# Altium PCB ALTAIR_PD_Sergeant_V26.2b_Reference.PcbDoc (part 2 of 4)
Units mm, origin at the board's own origin, x right, y up, seen from the top; angles counter-clockwise.
Board outline 74 x 56 mm, 4 copper layers (Top Layer, Layer 1, Layer 2, Bottom Layer), stack 1.675 mm thick; 187 components, 116 nets, 602 pads, 425 vias.
Unrouted connection lines stored in the file: 4.
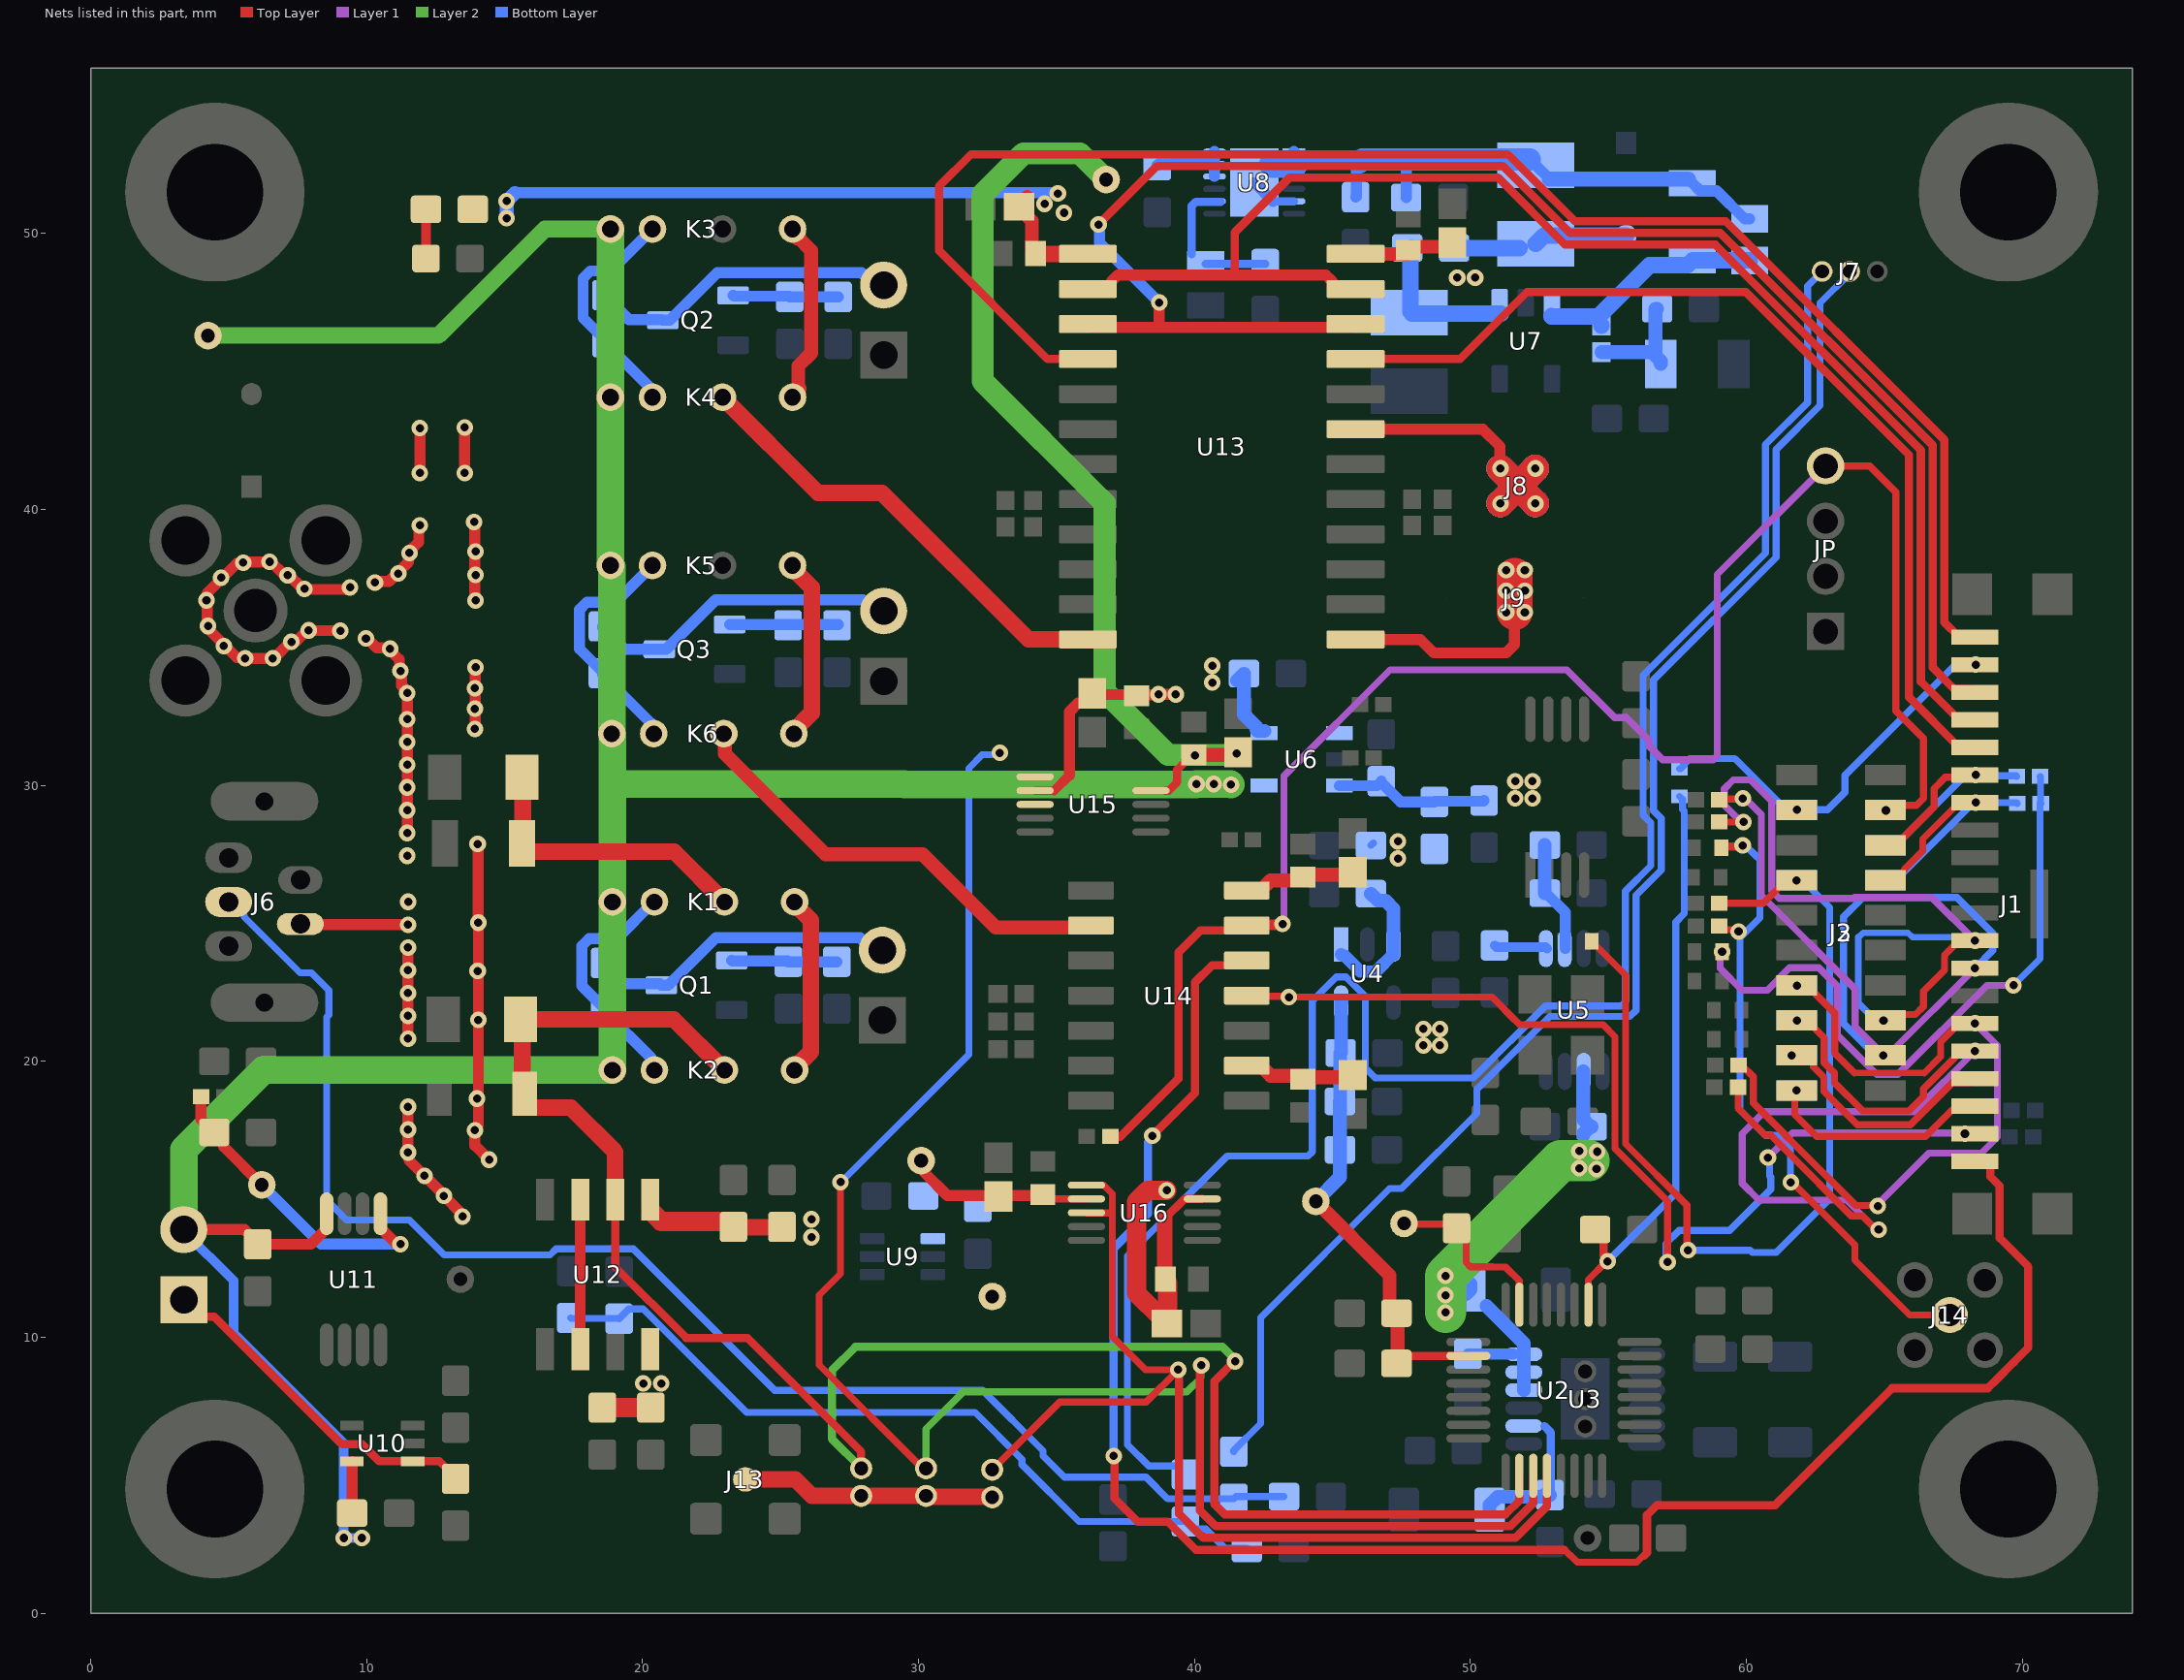
[diagram p4: the nets of this part, all layers, seen from the top]

## Part data
C00 C0 C22 C23 C24 C25 C26 C27 C28 C29 C30 C31 C32 C33 C34 C35 C36 C37 C38 C39 C40 C41 C42 C43 C44 C45 C46 C47 C48 C49 C50 C51 C52 C53: library part CAP, "Cap, Nonpolar, Any, Must choose footprint manually"
C1 C2 C3 C56: library part CAP, "Cap Ceramic 10uF 50V X5R 20% Pad SMD 1206 85C Automotive T/R"
C4 C5 C6 C7 C8 C9 C11 C12 C15 C17: library part CAP, "Murata GRT188R61H105KE13D - Cap MLCC AEC-Q200 X5R 1uF 50V 0603"
C10: library part CAP, "Cap ceramic 10uF 25V X5R 0603"
C13 C54 C55: library part CAP, "Cap Ceramic 0.1uF 50V X7R 10% 0603 125C Paper T/R"
C14 C18 C19 C20: library part CAP, "Cap Ceramic 10uF 25V X5R 0603"
C16: library part CAP, "Cap Ceramic 330pF 50V 5% NP0 1206"
C21: library part CAP, "Cap Ceramic 4.7uF 10V X5R 0805"
D1: library part Schottky, "DIODE SCHOTTKY 20V 500MA SOD123", Average Rectified Current=500mA, Case/Package=SOD-123-2, Forward Voltage=385mV, Max Forward Surge Current (Ifsm)=5.5A, Max Operating Temperature=125°C, Max Repetitive Reverse Voltage (Vrrm)=20V, Max Reverse Leakage Current=250uA, Min Operating Temperature=-65°C, Package Quantity=3000, Contact Plating=Tin, Current Rating=500mA, Element Configuration=Single, Forward Current=500mA, Height=1.12mm, Lead Free="Lead Free", Length=2.69mm, Max Reverse Voltage (DC)=20V, Max Surge Current=5.5A, Number of Pins=2, Output Current=500mA, Packaging="Tape and Reel", Peak Non-Repetitive Surge Current=5.5A, Peak Reverse Current=250uA, Polarity=Standard, Radiation Hardening=No, REACH SVHC="No SVHC", Termination=SMD/SMT, Voltage Rating (DC)=20V, Width=1.6mm
D2: library part LED-blue, "LED BLUE CLEAR 0603 SMD", Case Code (Imperial)=0603, Case Code (Metric)=1608, Color=Blue, Forward Current=30mA, Forward Voltage=3.2V, Manufacturer 1="Wurth Electronics", Manufacturer Part Number 1=150060BS75000, Max Operating Temperature=85°C, Min Operating Temperature=-40°C, Package Quantity=4000, Supplier Part Number 1=732-4966-1-ND, Test Current=20mA, Case/Package=0603, Category=LEDs, ComponentLink1Description=https://datasheet.ciiva.com/29563/150060bs75000-29563034.pdf?src-supplier=Digi-Key, ComponentLink1URL=https://datasheet.ciiva.com/29563/150060bs75000-29563034.pdf?src-supplier=Digi-Key, ComponentLink2Description=https://datasheet.ciiva.com/29279/759426-da-01-en-chipled-0603-w-kl-blau-150060bs75000-29279193.pdf?src-supplier=Conrad, ComponentLink2URL=https://datasheet.ciiva.com/29279/759426-da-01-en-chipled-0603-w-kl-blau-150060bs75000-29279193.pdf?src-supplier=Conrad, ComponentLink3Description=https://datasheet.ciiva.com/29563/150060bs75000-29563035.pdf?src-supplier=Digi-Key, ComponentLink3URL=https://datasheet.ciiva.com/29563/150060bs75000-29563035.pdf?src-supplier=Digi-Key, ComponentLink4Description=https://datasheet.ciiva.com/29563/150060bs75000-29563036.pdf?src-supplier=Digi-Key, ComponentLink4URL=https://datasheet.ciiva.com/29563/150060bs75000-29563036.pdf?src-supplier=Digi-Key, ComponentLink5Description=https://datasheet.ciiva.com/22656/1911343-22656939.pdf?src-supplier=Element14, ComponentLink5URL=https://datasheet.ciiva.com/22656/1911343-22656939.pdf?src-supplier=Element14, ComponentLink6Description=https://datasheet.ciiva.com/48430/150060bs75000-eng-tds-48430039.pdf?src-supplier=Distrelec, ComponentLink6URL=https://datasheet.ciiva.com/48430/150060bs75000-eng-tds-48430039.pdf?src-supplier=Distrelec, Dominant Wavelength=470nm, Height=0.7mm, Length=1.6mm, Lens Style=Clear,Rectangular, Luminous Intensity=145mcd, Mount="Surface Mount", Packaging="Cut Tape", REACH SVHC=Unknown, RoHS=Yes, Stock 1=66561, Supplier 1=Digi-Key, Viewing Angle=140°, Wavelength=470nm, Width=0.8mm
D3: library part Zener, "DIODE ZENER SOD123"
H1 H2 H3 H4: "(Plated) Mounting hole"
J1: "20x1 Header SMD", Manufacturer_Name=Hirose, Manufacturer_Part_Number=DF19-20P-1V(52), Mouser Part Number=798-DF1920P1V52, Datasheet Link=https://www.hirose.com/en/product/document?clcode=CL0685-0037-0-52&productname=DF19-20P-1V(52)&series=DF19&documenttype=2DDrawing&lang=en&documentid=0001394451, Height=5.37mm, Mouser Price/Stock=https://www.mouser.co.uk/ProductDetail/Hirose-Connector/DF19-20P-1V52?qs=QNEnbhJQKvayaXitD7MtBA%3D%3D
J2 J3: "10x2 Stacking Header SMD /  / 20 Position Receptacle Connector 0.050 (1.27mm) Surface Mount, Right Angle Gold", Package=None, Check_prices=https://www.snapeda.com/parts/CLP-110-02-L-D/Samtec/view-part/?ref=eda, MF=Samtec, MP=CLP-110-02-L-D, SnapEDA_Link=https://www.snapeda.com/parts/CLP-110-02-L-D/Samtec/view-part/?ref=snap
  J3: System=Connector
J4: "Coaxial, SMA Female Jack, 50 Ohm, Through-Hole", Manufacturer_Name="Wurth Elektronik", Mouser Part Number=710-60312002114503, Datasheet Link=https://katalog.we-online.de/em/datasheet/60312002114503.pdf, Height=9.56mm, Manufacturer_Part_Number=60312002114503, Mouser Price/Stock=https://www.mouser.co.uk/ProductDetail/Wurth-Elektronik/60312002114503?qs=3jNSNtuqJTL%2FGpZA1FAOxw%3D%3D
J5 J10 J11 J12: library part "Jumper 2POS", "CONN HEADER VERT 2POS", Operating Temperature="-55°C ~ 125°C", Supplier Part Number 1=SAM1068-01-ND, Supplier 1=Digi-Key
J6: "Conn Mini-USB RCP 5 POS Solder ST Thru-Hole 5 Terminal 1 Port", Color=Black, Flammability Rating="UL94 V-0", Manufacturer 1="Amphenol Commercial", Manufacturer Part Number 1=UE25BE5510H, Supplier Part Number 1=UE25BE5510H-ND, Category="USB Connectors", ComponentLink1Description=http://components.arrow.com/part/dataview/0323_00956300?src-supplier=Arrow+Europe, ComponentLink1URL=http://components.arrow.com/part/dataview/0323_00956300?src-supplier=Arrow+Europe, ComponentLink2Description=http://www.alliedelec.com/m/d/e7e3d7a920045eebbdef787e60d8b001.pdf?src-supplier=Allied+Electronics, ComponentLink2URL=http://www.alliedelec.com/m/d/e7e3d7a920045eebbdef787e60d8b001.pdf?src-supplier=Allied+Electronics, ComponentLink3Description=https://www.amphenolcanada.com/ProductSearch/drawings/AC/UE25BEX510X.pdf?src-supplier=Digi-Key, ComponentLink3URL=https://www.amphenolcanada.com/ProductSearch/drawings/AC/UE25BEX510X.pdf?src-supplier=Digi-Key, Contact Material="Copper Alloy", Contact Plating=Gold, Features="High Temperature", Gender=Female, Lead Free="Lead Free", Mount="Through Hole", Number of Contacts=5, Number of Positions=5, RoHS=Yes, Stock 1=6446, Supplier 1=Digi-Key, Termination=PCB
J7: "3x1 Header SMD", Manufacturer_Name="GCT (GLOBAL CONNECTOR TECHNOLOGY)", Datasheet Link=https://www.mouser.com/datasheet/2/837/BC020-1948594.pdf, Height=3.2mm, Manufacturer_Part_Number=BC020-03-A-0200-0300-L-G
J8: library part 855-22-004-30-004101, "2x2 Spring-Loaded SMD 50mil pitch", Manufacturer_Name=Mill-Max, Mouser Part Number=575-8552200430004101, Datasheet Link=https://www.mill-max.com/products/datasheet/sockets/855-22-004-30-004101, Height=4.22mm, Manufacturer_Part_Number=855-22-004-30-004101, Mouser Price/Stock=https://www.mouser.co.uk/ProductDetail/Mill-Max/855-22-004-30-004101?qs=t7xnP681wgXVXSRyupa05g%3D%3D, System=Connector
J9: "Pad for Pogo Pins with Guard", System=Connector
J13: library part MMCX_recp, "Conn MMCX F 50Ohm Solder ST SMD Gold Tray", Case/Package=SMA, Dielectric Material=PTFE, Housing Color=Gold, Manufacturer=Molex, Manufacturer Part Number=0734152061, Manufacturer Part Number 1=73391-0070, Max Frequency=6GHz, Max Operating Temperature=165°C, Min Operating Temperature=-55°C, Package Quantity=1600, Supplier Part Number 1=WM5560-ND, Voltage Rating=170V, Body Material=Brass, Body Plating=Gold, Category="RF / Coaxial Connectors", ComponentLink1Description=https://datasheet.ciiva.com/30257/448910733910070-rf-coax-nectors-30257114.pdf?src-supplier=Onlinecomponents.com, ComponentLink1URL=https://datasheet.ciiva.com/30257/448910733910070-rf-coax-nectors-30257114.pdf?src-supplier=Onlinecomponents.com, ComponentLink2Description=https://datasheet.ciiva.com/5175/0733910070-rf-coax-connectors-173128-5175036.pdf?src-supplier=Mouser, ComponentLink2URL=https://datasheet.ciiva.com/5175/0733910070-rf-coax-connectors-173128-5175036.pdf?src-supplier=Mouser, ComponentLink3Description=https://datasheet.ciiva.com/15172/getdatasheetpartid-226633-15172901.pdf?src-supplier=Verical, ComponentLink3URL=https://datasheet.ciiva.com/15172/getdatasheetpartid-226633-15172901.pdf?src-supplier=Verical, ComponentLink4Description=https://datasheet.ciiva.com/9419/0733910070-rf-coax-connectors-9419351.pdf?src-supplier=Avnet, ComponentLink4URL=https://datasheet.ciiva.com/9419/0733910070-rf-coax-connectors-9419351.pdf?src-supplier=Avnet, ComponentLink5Description=https://datasheet.ciiva.com/16677/0733910070-rf-coax-connectors-16677276.pdf?src-supplier=Avnet+Europe, ComponentLink5URL=https://datasheet.ciiva.com/16677/0733910070-rf-coax-connectors-16677276.pdf?src-supplier=Avnet+Europe, ComponentLink6Description=https://datasheet.ciiva.com/15237/133380734152061-rf-coax-nectors-15237680.pdf?src-supplier=Arrow+Europe, ComponentLink6URL=https://datasheet.ciiva.com/15237/133380734152061-rf-coax-nectors-15237680.pdf?src-supplier=Arrow+Europe, ComponentLink7Description=https://datasheet.ciiva.com/18494/734152061-sd-18494866.pdf?src-supplier=Digi-Key, ComponentLink7URL=https://datasheet.ciiva.com/18494/734152061-sd-18494866.pdf?src-supplier=Digi-Key, ComponentLink8Description=https://datasheet.ciiva.com/3951/128690734152061-rf-coax-nectors-3951867.pdf?src-supplier=Arrow+Electronics, ComponentLink8URL=https://datasheet.ciiva.com/3951/128690734152061-rf-coax-nectors-3951867.pdf?src-supplier=Arrow+Electronics, Connector Type=PCB,SMA,Coaxial, Contact Material=Copper, Contact Plating=Gold, Depth=6.08mm, Fastening Type=Snap, Gender=Female, Halogen Free="Low Halogen", Impedance=50R, Insulation Material=Teflon, Lead Free="Lead Free", Length=6.08mm, Manufacturer 1=Molex, Mount="Through Hole", Orientation=Straight, Packaging=Bulk, Plating=Gold, Pricing 1="1=2.42000, 10=2.19800, 25=2.06320, 50=1.97360, 100=1.88390, 250=1.70448, 500=1.56992, 1000=1.34565, 2500=1.25594 (USD)", Radiation Hardening=No, REACH SVHC=Unknown, RoHS=Yes, Stock 1=31911, Supplier 1=Digi-Key, Termination=Solder
J14: library part CMP-207975-000001-3, "Rf Coaxial, Mmcx Jack, 50 Ohm, Pcb Rohs Compliant: Yes", Dielectric Material=PTFE, Insulation Resistance=1GΩ, Max Operating Temperature=155°C, Min Operating Temperature=-55°C, Voltage Rating=170V, Connector Type=MMCX, Contact Material="Gold, Nickel", Height=4.6mm, Impedance=50Ω, Insertion Loss (dB)=0.25dB, Insulation Material=PTFE, Number of Contacts=1, RoHS=Compliant
J_ACF J_IVC J_TIA: library part BC020-02-A-0200-0300-L-G, "2x1 Header SMD", Manufacturer_Name="GCT (GLOBAL CONNECTOR TECHNOLOGY)", Mouser Part Number=640-BC02002A02300LG, Datasheet Link=https://gct.co/connector/bc020, Manufacturer_Part_Number=BC020-02-A-0200-0300-L-G, Mouser Price/Stock=https://www.mouser.co.uk/ProductDetail/GCT/BC020-02-A-0200-0300-L-G?qs=KUoIvG%2F9IlakgsojlT9P9w%3D%3D
JP: "4x1 Header SMD Partial Shroud", Manufacturer_Name="TE Connectivity", Mouser Part Number=571-440054-4, Arrow Part Number=440054-4, Arrow Price/Stock=https://www.arrow.com/en/products/440054-4/te-connectivity?utm_currency=USD&region=europe, Datasheet Link=https://www.te.com/commerce/DocumentDelivery/DDEController?Action=srchrtrv&DocNm=1-1773713-2_HPI_QRG_EN&DocType=Data%20Sheet&DocLang=English&PartCntxt=440054-4&DocFormat=pdf, Height=6.35mm, Manufacturer_Part_Number=440054-4, Mouser Price/Stock=https://www.mouser.co.uk/ProductDetail/TE-Connectivity/440054-4?qs=JFPmFzpscO7310iGSDds%2FA%3D%3D
K1 K2 K3 K4 K5 K6: library part "RELAY 118-A-5/2D", "High coil resistance SIL/SIP Reed Relay 118-A-5/2D"
L1 L2: library part IND, "Inductor 10uH 20% 0.9A 0.1729Ohm 1210", Case Code (Imperial)=1210, Case Code (Metric)=3225, Current Rating=900mA, DC Resistance (DCR)=172.9mR, Inductance Tolerance=20%, Max Operating Temperature=105°C, Min Operating Temperature=-40°C, Package Quantity=1000, Resistor Type=Wirewound, Self Resonant Frequency=23MHz, Test Frequency=100kHz, Case/Package=1210, Core Material=Ferrite, DC Current=900mA, Depth=2.7mm, Halogen Free="Halogen Free", Height=2.5mm, Height - Seated (Max)=0.106inch, Inductance=10uH, Lead Free="Lead Free", Length=3.4mm, Max DC Current=900mA, Military Standard=Not, Mount="Surface Mount", Number of Pins=2, Packaging="Tape and Reel", Radiation Hardening=No, Saturation Current=900mA, Series=CB, Shielding=Unshielded, Termination=SMD/SMT, Tolerance=20%, Width=0.098inch
Q1 Q2 Q3: library part "NMOS DMG2302UK", "DIODES INC. Power MOSFET, N Channel, 20 V, 2.8 A, 0.061 ohm, SOT-23, Surface Mount", Case/Package=TO-236-3, Continuous Drain Current (ID)=2.8A, Drain to Source Voltage (Vdss)=20V, Input Capacitance=130pF, Manufacturer=Vishay, Manufacturer 1=Diodes, Manufacturer Part Number=Si7414DN, Manufacturer Part Number 1=DMG2302UK-7, Max Operating Temperature=150°C, Max Power Dissipation=660mW, Min Operating Temperature=-55°C, Supplier Part Number=SI7414DN-T1-E3CT-ND, Supplier Part Number 1=DMG2302UK-7DICT-ND, Category=MOSFETs, ComponentLink1Description=http://www.farnell.com/datasheets/2814387.pdf?src-supplier=Farnell, ComponentLink1URL=http://www.farnell.com/datasheets/2814387.pdf?src-supplier=Farnell, ComponentLink2Description=http://www.farnell.com/datasheets/2814387.pdf?src-supplier=Element14, ComponentLink2URL=http://www.farnell.com/datasheets/2814387.pdf?src-supplier=Element14, ComponentLink3Description=https://www.diodes.com/assets/Datasheets/DMG2302UK.pdf?src-supplier=Digi-Key, ComponentLink3URL=https://www.diodes.com/assets/Datasheets/DMG2302UK.pdf?src-supplier=Digi-Key, ComponentLink4Description=http://www.farnell.com/datasheets/2814387.pdf?src-supplier=Newark, ComponentLink4URL=http://www.farnell.com/datasheets/2814387.pdf?src-supplier=Newark, Last Edited By="Russell Burge", Last Edited On=3/9/2016, Mount="Surface Mount", Packaging="Tape and Reel", Rds On Max=90mR, RoHS=Yes, Stock 1=551704, Supplier=Digikey, Supplier 1=Digi-Key
R0 R27 R28 R29 R30 R31 R32 R33 R34 R35 R36 R37 R38 R39 R40 R41 R42 R43 R44 R45 R46 R47 R48 R49 R50 R51 R52 R53 R54 R55 R56 R57 R99: library part RES, "Res, Any, Manually select footprint"
R1 R17 R58 R59: library part RES, "Vishay CRCW060310K0FKEA SMD 0603 10k, CRCW e3 Series, 75V, thick film, 100mW"
R2 R5 R6 R7 R9 R10 R11 R12 R13: library part RES, "Res 47Ohm 5% 0.063W 0402 Thick Film AEC-Q200 compliant"
R3 R4 R8 R63 R64: library part RES, "Yageo RC0402R-070RL"
R14 R19 R20: library part RES, "Res 0603 ??k ohms 0.1W"
R15: library part RES, "Res SMD 0603 0.1% 0.10W T.C. 10ppm 75K"
R16: library part RES, "Res SMD 150kOhm 1% 1/8W 0603"
R18: library part RES, "Res SMD 330 Ohm 1% 1/10W 0603"
R21: library part RES, "Yageo RC0603FR-07100KL - Res 100kOhm 1% 1/10W 0603"
R22: library part RES, "Yageo RC0603FR-07200KL - Res 200kOhm 1% 1/10W 0603"
R23: library part RES, "Panasonic ERA-6AEB303V - Res 30kOhm 0.1% 1/8W 0805"
R24: library part RES, "Res 1kOhm 1% 1/16W 0402"
R25: library part RES, "Vishay TNPU12061K50BZEN00 - Res 1.5kOhm 0.1% 1/4W 1206"
R26: library part RES, "Res SMD 150kOhm  1% 1/8W 0603"
R60 R61 R62: library part RES, "Anti-Sulfurated Res Automotive Grade 33Ohm 1% 100ppm/C 0402"
RT1: library part "THERM_RES NTC 0603 10K 1%", "THERMISTOR NTC 10KOHM 3380K 0603", Case Code (Imperial)=0603, Case Code (Metric)=1608, Manufacturer 1=Murata, Manufacturer Part Number 1=NCU18XH103F60RB, Max Operating Temperature=125°C, Min Operating Temperature=-40°C, Supplier Part Number 1=490-16279-1-ND, Case/Package=0603, Category=Thermistors, ComponentLink1Description=http://www.farnell.com/datasheets/2095755.pdf?src-supplier=Farnell, ComponentLink1URL=http://www.farnell.com/datasheets/2095755.pdf?src-supplier=Farnell, ComponentLink2Description=https://www.murata.com/en-us/products/productdata/8796836233246/L0770E.pdf?src-supplier=Digi-Key, ComponentLink2URL=https://www.murata.com/en-us/products/productdata/8796836233246/L0770E.pdf?src-supplier=Digi-Key, ComponentLink3Description=http://www.farnell.com/datasheets/2095755.pdf?src-supplier=Element14, ComponentLink3URL=http://www.farnell.com/datasheets/2095755.pdf?src-supplier=Element14, REACH SVHC="No SVHC", RoHS=No, Stock 1=48580, Supplier 1=Digi-Key
U1: "LVCMOS CLOCK BUFFER 3-CHANNEL"
U2: "24BIT ADC Delta-Sigma 4k samples/s PGA V-reference", Case/Package=LQFP, Manufacturer 1="Texas Instruments", Max Operating Temperature=125°C, Min Operating Temperature=-50°C, Supplier Part Number 1=296-45170-1-ND, Category="Analog to Digital Converters (ADCs)", ComponentLink1Description=http://www.ti.com/general/docs/lit/getliterature.tsp?genericPartNumber=ADS124S08&fileType=pdf&src-supplier=Farnell, ComponentLink1URL=http://www.ti.com/general/docs/lit/getliterature.tsp?genericPartNumber=ADS124S08&fileType=pdf&src-supplier=Farnell, ComponentLink2Description=http://www.ti.com/lit/ds/symlink/ads124s06.pdf?src-supplier=Digi-Key, ComponentLink2URL=http://www.ti.com/lit/ds/symlink/ads124s06.pdf?src-supplier=Digi-Key, Interface=SPI, Manufacturer Part Number 1=ADS124S08IPBSR, Mount="Surface Mount", Number of A/D Converters=1, Number of Bits=24, Number of Inputs=12, Number of Pins=32, Packaging="Tape and Reel", RoHS=No, Sampling Rate=4000S/s, Stock 1=2523, Supplier 1=Digi-Key
U3: "20V 500mA Ultralow Noise Ultrahigh PSRR Adjustable Linear Regulator 260V Dropout MSOP-12", Case/Package=MSOP, Dropout Voltage=260mV, Manufacturer 1="Analog Devices / Linear Technology", Manufacturer Part Number 1=LT3045EMSE#PBF, Max Operating Temperature=125°C, Min Current Limit=570mA, Min Operating Temperature=-40°C, Output Current=500mA, Output Voltage=15V, Supplier Part Number 1=LT3045EMSE#PBF-ND, ComponentLink1Description=http://www.farnell.com/datasheets/2163219.pdf?src-supplier=Farnell, ComponentLink1URL=http://www.farnell.com/datasheets/2163219.pdf?src-supplier=Farnell, ComponentLink2Description=http://www.linear.com/docs/55649?src-supplier=Digi-Key, ComponentLink2URL=http://www.linear.com/docs/55649?src-supplier=Digi-Key, Number of Regulators=1, RoHS=Yes, Stock 1=1588, Supplier 1=Digi-Key
U4: library part ADP7142AUJZ-R7, "1.2-40V 200mA Low Noise CMOS LDO Adjustable Linear Regulator TSOT23", Ambient Temperature Range High=+125°C, Ambient Temperature Range Low=-40°C, Dropout Voltage=200mV, Manufacturer="Analog Devices", Max Junction Temp=+150°C, Max Supply Voltage=40V, Min Supply Voltage=2.7V, Nominal Supply Current=50-180uA, Output Current=200mA, Output Voltage=1.2-5V, Package=UJ-5, Temperature="-40°C to +125°C", Accuracy Percentage=0.8%, Automotive=No, Category=IC, ComponentLink2Description=Datasheet, ComponentLink2URL=https://www.analog.com/media/en/technical-documentation/data-sheets/ADP7142.pdf, Device Class L1="Integrated Circuits (ICs)", Device Class L2="Power Management ICs", Device Class L3="Voltage Regulators - Linear", Digikey Description="IC REG LIN POS ADJ 200MA TSOT23", Height=1mm, Lead Free=Yes, Manufacturer Part Number=ADP7142AUJZ-5.0-R7, Mouser Description="LDO Regulator Pos 1.5V to 5V 0.2A 5-Pin TSOT-23 T/R", Number of Outputs=1, Octopart=https://octopart.com/adp7142aujz-r7-analog+devices-38928114, Output Type=AdjustableProgrammable, RoHS=TRUE, Temperature Range High=+125°C, Temperature Range Low=-40°C
U5: library part REF5050IDGKR, "5V±0.05% Voltage Reference 8VSSOP", Case/Package=VSSOP, Manufacturer="Texas Instruments", Max Input Voltage=18V, Max Operating Temperature=125°C, Max Output Current=10mA, Max Output Voltage=5V, Min Input Voltage=5.2V, Min Operating Temperature=-40°C, Nominal Supply Current=800uA, Operating Supply Current=1.2mA, Package Quantity=1, Supplier Part Number 1=296-27505-1-ND, Temperature Coefficient=3ppm/°C, Tolerance=0.05%, Category="Voltage References", ComponentLink1Description=https://datasheet.ciiva.com/2007/ref5020-2007532.pdf?src-supplier=Digi-Key, ComponentLink1URL=https://datasheet.ciiva.com/2007/ref5020-2007532.pdf?src-supplier=Digi-Key, ComponentLink2Description=https://datasheet.ciiva.com/14197/ref5050-14197084.pdf?src-supplier=Avnet, ComponentLink2URL=https://datasheet.ciiva.com/14197/ref5050-14197084.pdf?src-supplier=Avnet, ComponentLink3Description=https://datasheet.ciiva.com/2007/ref5020-2007533.pdf?src-supplier=Digi-Key, ComponentLink3URL=https://datasheet.ciiva.com/2007/ref5020-2007533.pdf?src-supplier=Digi-Key, ComponentLink4Description=https://datasheet.ciiva.com/2007/ref5020-2007534.pdf?src-supplier=Digi-Key, ComponentLink4URL=https://datasheet.ciiva.com/2007/ref5020-2007534.pdf?src-supplier=Digi-Key, ComponentLink5Description=https://datasheet.ciiva.com/41462/001014471-da-01-en-ic-vref-series-ref5050idgkr-vssop-8-tid-41462326.pdf?src-supplier=Conrad, ComponentLink5URL=https://datasheet.ciiva.com/41462/001014471-da-01-en-ic-vref-series-ref5050idgkr-vssop-8-tid-41462326.pdf?src-supplier=Conrad, Lead Free="Lead Free", Manufacturer Part Number=REF5050IDGKR, Min Output Voltage=5V, Number of Channels=1, Number of Pins=8, Output Current=10mA, Output Type=Fixed, Output Voltage=5V, Packaging="Tape and Reel", Pricing 1="1=6.18000, 10=5.58100, 25=5.32200, 100=4.41320, 250=4.02380, 500=3.76420, 1000=3.45268 (USD)", Quiescent Current=800uA, Radiation Hardening=No, Reference Type=Series, RoHS=Yes, Stock 1=2539, Supplier 1=Digi-Key, Weight=0.00067oz
U6: library part OPA182IDBVR, "Op amp, Highest-precision, 36-V, 5-MHz, single, low-noise, zero-drift, MUX-friendly amplifier 5-SOT-23 -40 to 125", Manufacturer_Name="Texas Instruments", Copyright="Copyright (C) 2025 Ultra Librarian. All rights reserved.", Manufacturer_Part_Number=OPA182IDBVR, RefDes=RefDes, Type=Type
U7: library part LM2611AMF, "1.4MHz Cuk Converter, 5-pin SOT-23, Pb-Free", Manufacturer="Texas Instruments", PackageTopMarking=S40A*XTT, PowerWise=N, ComponentLink1Description="Datasheet URL", ComponentLink1URL=http://www.ti.com/general/docs/lit/getliterature.tsp?genericPartNumber=LM2611&fileType=pdf, CompType=Switcher, PackageDescription="Molded SOT-23, .115 x .063 x .040 in Body, 5 Lead, .0375 in Pitch", PackageReference=DBV0005A, PinCount=5, RoHS=Y
U8: "-20V 500mA Ultralow Noise Ultrahigh PSRR Adjustable Negative Linear Regulator 12DFN", RoHS Compliant=Yes
U9: "DAC 8bit 1 channel SPI Supply Reference Buffered Voltage"
U10: "OR Gate 1 Channel Low-Voltage CMOS SC-70-5", Current - Output High, Low="32mA, 32mA", Current - Quiescent (Max)=10µA, Device Package="5-TSSOP, SC-70-5, SOT-353", Manufacturer="Texas Instruments", Operating Temperature="-40°C ~ 125°C", Supplier Device Package=SC-70-5, Supplier Part Number 1=296-9848-1-ND, Voltage - Supply="1.65V ~ 5.5V", ComponentLink1Description=Datasheet, ComponentLink1URL=http://www.ti.com/general/docs/suppproductinfo.tsp?distId=10&gotoUrl=http%3A%2F%2Fwww.ti.com%2Flit%2Fgpn%2Fsn74lvc1g32, ComponentLink2Description="DigiKey Link", ComponentLink2URL=http://digikey.com/product-detail/en/texas-instruments/SN74LVC1G32DCKR/296-9848-1-ND/380106, LastUpdated="2020-01-31 3:20:00 AM", Lifecycle Status=Active, Logic Level - High="1.7V ~ 2V", Logic Level - Low="0.7V ~ 0.8V", Logic Type="OR Gate", Max Propagation Delay @ V, Max CL="4ns @ 5V, 50pF", Minimum Order=1, Mounting Type="Surface Mount", Number of Circuits=1, Number of Inputs=2, Package / Case="5-TSSOP, SC-70-5, SOT-353", Packaging=TapeAndReel, Part Number=SN74LVC1G32DCKR, Part Status=Active, PartId=3, Price=0.05, Series=74LVC, Supplier 1=DigiKey
U11: "Analog Switch Single SPDT 8-Pin MSOP T/R", Case/Package=MSOP, Dual Supply Voltage=15V, Manufacturer="Analog Devices", Max Dual Supply Voltage=16.5V, Max Operating Temperature=125°C, Max Power Dissipation=2mW, Max Supply Current=95uA, Min Dual Supply Voltage=4.5V, Min Operating Temperature=-40°C, Min Supply Voltage=5V, On-State Resistance=2.4R, Operating Supply Voltage=12V, Package Quantity=1000, Supplier Part Number 1=ADG1419BRMZ-REEL7CT-ND, Test Frequency=1MHz, -3db Bandwidth=135MHz, Bandwidth=135MHz, Category="Decoders and Multiplexers", ComponentLink1Description=https://datasheet.ciiva.com/15127/getdatasheetpartid-348881-15127783.pdf?src-supplier=Verical, ComponentLink1URL=https://datasheet.ciiva.com/15127/getdatasheetpartid-348881-15127783.pdf?src-supplier=Verical, ComponentLink2Description=https://datasheet.ciiva.com/14846/adg1419-14846917.pdf?src-supplier=Digi-Key, ComponentLink2URL=https://datasheet.ciiva.com/14846/adg1419-14846917.pdf?src-supplier=Digi-Key, ComponentLink3Description=https://datasheet.ciiva.com/14846/adg1419-14846919.pdf?src-supplier=Digi-Key, ComponentLink3URL=https://datasheet.ciiva.com/14846/adg1419-14846919.pdf?src-supplier=Digi-Key, ComponentLink4Description=https://datasheet.ciiva.com/16637/adg1419-16637818.pdf?src-supplier=Avnet+Europe, ComponentLink4URL=https://datasheet.ciiva.com/16637/adg1419-16637818.pdf?src-supplier=Avnet+Europe, ComponentLink5Description=https://datasheet.ciiva.com/2980/adg1419-2980845.pdf?src-supplier=Avnet, ComponentLink5URL=https://datasheet.ciiva.com/2980/adg1419-2980845.pdf?src-supplier=Avnet, ComponentLink6Description=https://datasheet.ciiva.com/48708/001247710-da-01-en-ic-switch-2-adg1419brmz-reel7-msop-8-adi-48708556.pdf?src-supplier=Conrad, ComponentLink6URL=https://datasheet.ciiva.com/48708/001247710-da-01-en-ic-switch-2-adg1419brmz-reel7-msop-8-adi-48708556.pdf?src-supplier=Conrad, Contact Plating=Tin,Matte, Insertion Loss=0.16dB, Interface=Parallel, Lead Free="Contains Lead", Manufacturer Part Number=ADG1419BRMZ-REEL7, Max Supply Voltage=16.5V, Number of Channels=1, Number of Circuits=1, Number of Inputs=1, Number of Outputs=2, Number of Pins=8, Packaging="Tape and Reel", Polarity=Non-Inverting, Power Dissipation=2mW, Pricing 1="1=4.40000, 10=3.95100, 25=3.73520, 100=3.07100, 250=2.75560, 500=2.65600 (USD)", Radiation Hardening=No, RoHS=Yes, Stock 1=12144, Supplier 1=Digi-Key, Supply Type=Single,Dual, Throw Configuration=SPDT, Turn-Off Delay Time=140ns, Turn-On Delay Time=110ns
U12: "Op Amp, 36V, fA input, precision, e-trim", Manufacturer_Name="Texas Instruments", Mouser Part Number=595-OPA928DR, Arrow Part Number=OPA928DR, Arrow Price/Stock=null?region=nac, Datasheet Link=https://www.ti.com/lit/ds/symlink/opa928.pdf?HQS=dis-mous-null-mousermode-dsf-pf-null-wwe&ts=1731036524091&ref_url=https%253A%252F%252Fwww.ti.com%252Fgeneral%252Fdocs%252Fsuppproductinfo.tsp%253FdistId%253D26%2526gotoUrl%253Dhttps%253A%252F%252Fwww.ti.com, Height=1.75mm, Manufacturer_Part_Number=OPA928DR, Mouser Price/Stock=https://www.mouser.co.uk/ProductDetail/Texas-Instruments/OPA928DR?qs=2wMNvWM5ZX5RgAZJHoeYSw%3D%3D
U13: "Low Noise, Dual Switched Integrator, 14.5 to 36 V, -40 to 125 degC, 24-pin SOIC (DW24), Green (RoHS & no Sb/Br)", Manufacturer="Texas Instruments", Rating=Catalog, Total Supply Voltage(Max)(+5V is 5, +/-5V is 10)=36, Total Supply Voltage(Min)(+5V is 5, +/-5V is 10)=14.5, Code_JEDEC=MS-013, ComponentLink1Description="Manufacturer URL", ComponentLink1URL=http://www.ti.com/, ComponentLink2Description=Datasheet, ComponentLink2URL=http://www.ti.com/lit/ds/symlink/acf2101.pdf, ComponentLink3Description="Package Specification", ComponentLink3URL=http://www.ti.com/litv/pdf/mpds174a, DatasheetVersion=SBFS003, Eco-Plan="Green (RoHS & no Sb/Br)", GBW(Typ)(MHz)=2, Iq per channel(Max)(mA)=15, Mounting Technology="Surface Mount", Number of Channels=2, Offset Drift(Typ)(uV/C)=1, PackageDescription="24-Pin Plastic Small Outline, Body 15.4 x 7.5 mm, Pitch 1.27 mm", PackageReference=DW0024A, PackageVersion="4040000-5/G, 01/2011", Packing=TUBE, PartNumber=ACF2101BU, Slew Rate(Typ)(V/us)=3, Sub Family="Precision Amplifier", Vio (25C)(Max)(mV)=2
U14: library part IVC102/SO_5, "Precision Switched Integrator Transimpedance Amplifier", Part Reference=U1
U15 U16: "Programmable Gain Amplifier - Single Channel, Precision, -13 to 14 Gain Selectable Operational Amplifier, 0.56 MHz Typical GBW, 0.12 V/us Typical SR, 2.4 to 40 V, 10-Pin SOP (MS-10), Industial, Pb-Free, Reel", Linear Technology Part Number=LT1991, Manufacturer="Linear Technology", Channels (#)=1, ComponentLink1Description="Manufacturer URL", ComponentLink1URL=http://www.linear.com/, ComponentLink2Description=Datasheet, ComponentLink2URL=http://cds.linear.com/docs/en/datasheet/1991fh.pdf, ComponentLink3Description="Package Specification", ComponentLink3URL=http://cds.linear.com/docs/en/packaging/MSOP_10_05-08-1661.pdf, DatasheetVersion="Rev. H", GBW (MHz) Typical=0.56, Is (mA) Typical=0.1, Mounting Technology="Surface Mount", PackageDescription="10-Lead Plastic MSOP, Body 3 x 3 mm, Pitch 0.5 mm", PackageReference=LT-MS-10, PackageVersion="Rev E", Packing=Reel, PartNumber=LT1991IMS#TRPBF, RevisionNote="URLs updated", RoHS=Pb-Free, SR (V/us) Typical=0.12, Type=SGA, Vos (mV) Guaranteed=0.05, Vos (mV) Typical=0.015, Vs Max (V)=40, Vs Min (V)=2.4
Y1: "MEMS OSC XO 33.33333MHZ H/LVCMOS", Case/Package=SMD/SMT, Frequency=33.33333MHz, Frequency Stability=50ppm, Max Operating Temperature=70°C, Max Supply Current=4.5mA, Min Operating Temperature=-20°C, Height=0.032inch, Length=0.126inch, Mount="Surface Mount", Packaging="Tape and Reel", RoHS Compliant=Yes, Series=SIT1602, Width=0.098inch

## Via types
v1: diameter 0.6, hole 0.3, Top Layer to Bottom Layer, tented both sides, 244 vias
v2: diameter 0.8, hole 0.5, Top Layer to Bottom Layer, 122 vias
v3: diameter 0.6, hole 0.3, Top Layer to Bottom Layer, 59 vias

## Nets (pads, with @x,y where several pads share a name; then routed paths per layer and width w, separated by ;. In a path a pad name is that pad's centre, name@x,y a point inside that pad or via, vN(x,y) a via of type N, cw(c..) or ccw(c..) an arc to the next point about the centre after c; other vN are vias at no path point)
7V5: C4.2 C5.2 C8.2 C12.2 C28.2 C29.2 C35.2 C36.2 C37.2 C38.2 C56.2 R16.2 R18.2 R21.2 TP1.1 U3.10 U3.11 U3.12 U4.1 U4.3 U5.2 U6.5 U12.5 U13.13 U14.14 | length 59.7
  Top Layer w0.5: C28.2@25.05,13.994 C28.2@25.05,14 ; C36.2@33.937,51.325 33.937,50.863 33.762,50.863 C36.2@33.651,50.975 33.7,50.975 33.953,50.722 33.953,50.615 34.114,50.454 34.114,49.4 C35.2@34.239,49.275 ; U13.13@36.138,49.255 U13.13@36.143,49.26 ; U14.14@41.9,26.191 42.4,26.191 42.759,26.55 43.807,26.55 44.019,26.762 45.652,26.762 C38.2@45.74,26.849
  Top Layer w0.6: C29.2@23.375,13.979 C28.2@25.065,13.979 ; C35.2@34.384,49.255 U13.13@36.138,49.255
  Top Layer w0.7: U12.5@20.305,14.574 20.68,14.2 23.146,14.2 23.296,14.05 C29.2@23.296,14
  Layer 2 w1.5: v1(49.1,10.9) v1(49.1,11.525) v1(49.1,12.225) 53.275,16.4 54.3,16.4
  Bottom Layer w0.254: C4.2@46.4,27.826 C4.2@46.483,27.909 ; v1@47.309,27.909 v1(47.375,27.975)
  Bottom Layer w0.4: 15.375,51.475 35.025,51.475 v1(35.05,51.45) ; R16.2@49.915,9.392 U3.12@51.554,9.392
  Bottom Layer w0.45: U4.1@45.319,23.873 45.36,23.832 45.436,23.832 46.018,23.25 46.575,23.25 47.219,23.894 U4.3@47.219,24.234
  Bottom Layer w0.5: v1(15.075,50.55) v1@15.075,51.125 ; v1(15.075,51.175) 15.375,51.475 ; C12.2@41.545,33.8 C12.2@41.795,34.05 41.795,32.57 42.241,32.123 42.241,32.025 42.291,31.975 U6.5@42.541,31.975 ; C5.2@46.4,26.072 46.65,25.822 46.926,25.822 47.219,25.529 U4.3@47.219,24.234 U4.3@47.219,23.882 ; C56.2@49.7,12.231 50,11.931 C56.2@50,11.725 C56.2@49.844,11.569 ; 50.587,11.134 51.939,9.782 51.939,9.386 51.939,8.736 U3.10@51.939,8.086 ; U5.2@54.091,19.636 54.091,17.892 C8.2@54.35,17.632 ; C8.2@54.1,17.332 54.1,17.382 C8.2@54.35,17.632 ; C8.2@54.4,17.632 C8.2@54.35,17.632
  other v1: 26.125,13.625 26.125,14.275 54.575,16.1 53.95,16.125 54.6,16.725 53.95,16.75 47.375,27.35 40.65,33.725 40.65,34.335 35.275,50.75 34.575,51.075
-15V: C20.1 C26.2 C27.2 C33.2 C34.2 C39.2 C40.2 C43.2 C44.2 C47.2 C48.2 TP5.1 U8.10 U8.11 U8.12 U12.4 U13.12 U14.9 U15.4 U16.4 | length 58.7
  Top Layer w0.3: C47.2@38.925,12.132 C47.2@38.95,12.107 ; 38.925,14.3 39.632,15.007 40.283,15.007 U16.4@40.288,15.012 ; U15.4@38.95,29.81 39.07,29.81 39.377,30.117 39.377,30.573 39.679,30.875 39.904,31.1 C43.2@39.979,31.1 ; C44.2@41.487,31.1 v1(41.537,31.15) C44.2@41.587,31.199
  Top Layer w0.5: C43.2@39.979,31.1 C44.2@41.487,31.1 ; U14.9@41.9,19.841 42.4,19.841 42.766,19.475 43.807,19.475 C39.2@43.932,19.35 ; C39.2@43.975,19.35 44.05,19.425 45.664,19.425 C40.2@45.74,19.501 ; U13.12@45.843,49.26 C33.2@47.748,49.26 ; C33.2@47.748,49.275 47.748,49.312 47.948,49.512 47.948,49.525 49.206,49.525 C34.2@49.355,49.674
  Top Layer w0.55: C47.2@38.925,12.132 38.925,14.3
  Top Layer w0.7: C26.2@18.546,7.45 C27.2@20.3,7.45 ; C47.2@38.95,12.107 38.95,12.032 39.024,11.958 39.024,10.653 38.999,10.628 C48.2@38.999,10.5 38.95,10.5 38.797,10.653 38.797,10.703 37.9,11.599 37.9,14.915 38.31,15.325 v1(39,15.325)
  Layer 2 w0.8: TP5.1@36.8,51.95 35.85,52.9 33.8,52.9 32.325,51.425 32.325,44.65 36.75,40.225 36.75,33.4 39.05,31.1 v1@41.512,31.1
  Bottom Layer w0.4: C20.1@38.645,52.481 C20.1@38.656,52.471 38.702,52.517 U8.11@40.728,52.517 ; U8.10@40.728,52.067 U8.11@40.728,52.517 ; U8.12@40.728,52.967 U8.11@40.728,52.517
  other v1: 20.03,8.325 20.675,8.325 48.3,20.575 48.9,20.575 48.3,21.175 48.9,21.175 40.019,31.078 49.525,48.4 50.175,48.4
-16V: C16.1 C18.1 C19.1 L2.2 R23.2 U8.1 U8.2 U8.3 U8.5 U8.13 | length 23
  Bottom Layer w0.3: U8.13@42.844,51.167 U8.5@43.61,51.167
  Bottom Layer w0.4: U8.13@42.169,51.842 U8.13@42.844,51.167 ; U8.2@43.61,52.517 U8.1@43.61,52.967 43.875,52.701 ; C19.1@45.844,51.317 45.869,51.342 45.869,52.57 45.927,52.628 45.979,52.576 ; C18.1@47.675,51.3 47.675,52.685 ; L2.2@52.372,52.476 L2.2@52.872,51.975 ; C16.1@57.9,51.975 C16.1@58.05,51.825 58.325,51.55 58.925,51.55 59.95,50.525 R23.2@60.125,50.525
  Bottom Layer w0.55: L2.2@52.872,51.975 C16.1@57.9,51.975
  Bottom Layer w0.6: 43.875,52.701 45.853,52.701 45.927,52.628
  Bottom Layer w0.8: 45.979,52.576 46.089,52.685 47.675,52.685 L2.2@52.162,52.685
  Bottom Layer w0.99: U8.13@42.844,52.517 U8.2@43.61,52.517
\DRDY1: J1.6 J2.05 J3.06 R3.1 | length 10.5
  Top Layer w0.254: J2.05@65.05,27.835 65.418,27.835 66.806,29.223 66.806,29.881 67.218,30.293 68.234,30.293 v1(68.316,30.375)
  Bottom Layer w0.254: J3.06@65.05,27.835 65.418,27.835 67.892,30.309 68.25,30.309 v1(68.316,30.375) 68.341,30.35 69.775,30.35 R3.1@69.8,30.325
\DRDY2: J1.7 J2.07 J3.08 R4.1 | length 10.3
  Top Layer w0.254: J2.07@65.45,26.625 65.478,26.625 65.66,26.806 65.66,26.865 65.75,26.955 65.75,26.976 66.4,27.626 66.4,28.059 67.716,29.375 v1(68.316,29.375)
  Bottom Layer w0.254: J3.08@65.05,26.565 65.418,26.565 68.228,29.375 v1(68.316,29.375) 69.8,29.375 R4.1@69.825,29.35
\SPI_CS1: J1.15 J2.14 J3.13 R12.1 | length 27.2
  Top Layer w0.225: 63.925,19.575 66.45,19.575
  Top Layer w0.254: R12.1@59.725,19.866 R12.1@59.75,19.866 ; R12.1@59.827,19.869 60.254,19.442 60.254,18.493 61.044,17.703 61.895,16.852 63.967,14.78 64.743,14.78 v1(64.77,14.753) ; J2.14@61.824,22.755 62.192,22.755 63.206,21.741 63.206,20.294 63.925,19.575 ; 66.45,19.575 67.05,20.175 67.05,20.709 67.716,21.375 v1(68.291,21.375)
  Layer 1 w0.254: v1(64.77,14.753) 64.77,14.83 66.615,16.675 68.525,16.675 69.1,17.25 69.1,20.566 v1(68.291,21.375)
  other v1: 61.837,22.742
\SPI_CS2: J1.16 J2.16 J3.15 R13.1 | length 34.5
  Top Layer w0.254: R13.1@59.7,19.062 59.7,18.304 60.682,17.322 60.887,17.322 61.431,16.777 63.81,14.399 64.209,14.399 64.709,13.899 v1(64.799,13.899) ; J2.16@61.824,21.485 62.192,21.485 62.825,20.852 62.825,19.947 63.196,19.576 63.196,19.229 64.225,18.2 65.9,18.2 66.425,18.725 66.425,19 67.568,20.143 67.568,20.227 67.716,20.375 v1(68.291,20.375)
  Layer 1 w0.254: v1(64.799,13.899) 64.709,13.899 63.639,14.969 60.456,14.969 59.85,15.575 59.85,17.375 60.65,18.175 66.091,18.175 v1(68.291,20.375)
  other v1: 61.837,21.472
\SPI_CS3: J1.12 J2.15 J3.16 R9.1 | length 29.1
  Top Layer w0.254: R9.1@59.025,28.675 v1(59.9,28.675) ; J2.15@65.05,21.485 65.259,21.694 66.133,21.694 66.425,21.986 66.425,22.536 67.183,23.294 67.183,23.842 67.716,24.375 v1(68.291,24.375)
  Layer 1 w0.254: v1(59.9,28.675) 59.812,28.675 59.2,29.287 59.2,29.875 59.525,30.2 60.15,30.2 60.928,29.422 60.928,26.172 61.195,25.905 63.894,25.905 63.931,25.942 66.724,25.942 v1(68.291,24.375)
  Bottom Layer w0.23: 64.059,24.499 64.076,24.499 64.238,24.66 65.862,24.66 66.024,24.499 v1@68.074,24.499
  Bottom Layer w0.254: 64.059,24.499 64.059,22.107 64.682,21.485 J3.16@65.05,21.485 ; v1@68.074,24.499 68.198,24.375 v1(68.291,24.375)
  other v1: 64.974,21.485
\SPI_CS4: J1.13 J2.17 J3.18 R10.1 | length 31.9
  Top Layer w0.254: R10.1@59.025,29.479 59.05,29.504 59.849,29.504 v1@59.873,29.529 ; J2.17@64.961,20.24 64.986,20.215 J2.17@65.418,20.215 ; J1.13@67.568,23.227 67.716,23.375 v1(68.291,23.375)
  Layer 1 w0.254: v1@59.873,29.529 59.961,29.529 60.547,28.943 60.547,26.014 63.946,22.615 63.946,21.255 64.961,20.24 65.027,20.306 65.223,20.306 v1(68.291,23.375)
  Bottom Layer w0.254: J3.18@64.961,20.24 J3.18@64.986,20.215 ; J3.18@65.05,20.215 J3.18@64.986,20.215 ; v1(68.291,23.375) 68.938,24.022 68.938,24.643 67.639,25.943 64.233,25.943 63.525,25.234 63.525,21.372 64.682,20.215 J3.18@64.986,20.215
  other v1: 64.961,20.215 59.873,29.529
\SYS_RESET: J1.2 J2.04 J3.03 R2.1 | length 14.2
  Bottom Layer w0.254: R2.1@57.575,30.6 57.625,30.6 57.748,30.723 57.748,30.773 57.95,30.975 59.586,30.975 61.443,29.117 61.836,29.117 62.942,29.117 63.575,29.751 63.575,30.364 67.586,34.375 v1@68.291,34.375
  other v1: 61.836,29.117 68.316,34.375
A5V: C10.2 C11.2 C22.2 C23.2 C41.2 C42.2 C45.2 C46.2 TP3.1 U5.6 U9.4 U15.7 U16.7 | length 18.8
  Top Layer w0.26: C45.2@34.675,15.007 36.083,15.007 U16.7@36.088,15.012
  Top Layer w0.3: U15.7@34.225,29.81 34.914,29.81
  Top Layer w0.35: 34.914,29.81 35.47,30.366
  Top Layer w0.4: TP3.1@30.1,16.4 30.215,16.285 30.215,15.971 31.049,15.137 C46.2@32.713,15.137 ; C46.2@32.676,15.175 C46.2@32.713,15.137 ; C45.2@34.675,15.007 34.507,15.175 34.47,15.137 C46.2@32.713,15.137 ; 35.47,30.366 35.47,32.669 35.781,32.98 35.997,32.98 36.277,33.261 C42.2@36.277,33.333 ; C42.2@36.308,33.291 37.866,33.291 C41.2@37.907,33.25 37.932,33.275 38.675,33.275 38.712,33.312 38.725,33.3 v1(39.325,33.3)
  Bottom Layer w0.4: C10.2@52.75,26.09 53.441,25.399 U5.6@53.441,24.086
  Bottom Layer w0.5: C10.2@52.7,26.09 C11.2@52.7,27.844
  other v1: 51.625,29.525 52.25,29.525 51.625,30.15 52.25,30.15 38.7,33.3
A5VSW: C24.2 C25.2 J5.2 K1.1 K2.1 K3.1 K4.1 K5.1 K6.1 TP4.1 U6.1 U6.4 U10.5 U11.4 | length 111.1
  Top Layer w0.35: C25.2@6.055,13.369 C25.2@6.055,13.419 ; C24.2@9.45,3.6 C24.2@9.475,3.625
  Top Layer w0.4: J5.2@3.375,13.9 5.574,13.9 C25.2@6.055,13.419 ; C25.2@6.055,13.369 7.981,13.369 8.552,13.94 U11.4@8.552,14.475 ; C24.2@9.472,3.628 U10.5@9.472,5.501
  Layer 2 w0.6: TP4.1@4.25,46.3 12.6,46.3 16.463,50.163 K3.1@18.838,50.163
  Layer 2 w1: J5.2@3.375,13.9 3.375,16.8 6.257,19.682 K2.1@18.909,19.682 18.909,30.05 ; K3.1@18.838,50.163 18.838,44.067 18.838,37.971 18.885,37.923 K6.1@18.885,31.874 18.909,31.851 18.909,30.05 ; v1(41.327,30.026) 41.303,30.05 v1(40.7,30.05) v1(40.075,30.05) 40.052,30.027 29.499,30.027 29.475,30.05 18.909,30.05
  Bottom Layer w0.35: J5.2@3.375,13.9 3.375,13.85 5.175,12.05 5.175,10.15 9.175,6.15 v1(9.175,2.725) v1(9.825,2.725)
ADC_CLK: J2.08 J3.07 R60.1 R63.2 | length 33.6
  Top Layer w0.254: R60.1@54.4,24.35 54.4,24.3 54.523,24.177 54.573,24.177 55.628,23.122 55.628,17.007 57.848,14.786 57.848,13.193 v1@57.888,13.153 ; R63.2@59.025,25.725 60.616,25.725 61.443,26.552 v1(61.828,26.553)
  Bottom Layer w0.254: v1@57.888,13.153 60.139,13.153 60.217,13.075 61.086,13.075 63.025,15.014 63.025,25.575 J3.07@62.125,26.475
  other v1: 57.888,13.154
AVDD: C6.2 C7.2 C49.2 C50.2 R19.2 TP2.1 U2.26 U4.5 | length 17.5
  Top Layer w0.254: C50.2@47.325,10.806 C50.2@47.325,10.875
  Top Layer w0.3: C49.2@47.325,9.05 47.363,9.087 47.604,9.329 U2.26@49.929,9.329 ; C50.2@47.363,10.794 C50.2@47.375,10.806
  Top Layer w0.5: TP2.1@44.4,14.925 47.075,12.25 47.075,11.056 47.325,10.806 C50.2@47.375,10.806 ; C49.2@47.363,9.087 C50.2@47.363,10.794
  Bottom Layer w0.5: TP2.1@44.4,14.925 45.275,15.8 C6.2@45.275,16.794 45.275,18.554 45.288,18.567 45.288,20.296 45.319,20.327 U4.5@45.319,22.134 U4.5@45.325,22.14
DIG_GND: J2.03 J3.04 JP.4 R99.2 U14.13 | length 64.5
  Top Layer w0.254: JP.4@62.875,41.575 64.475,41.575 65.425,40.625 65.425,32.7 66.425,31.7 66.425,29.532 66.168,29.274 65.219,29.274 J2.03@65.05,29.105
  Top Layer w0.3: R99.2@36.95,17.275 36.957,17.268 37.318,17.268 39.425,19.375 39.425,23.95 40.221,24.746 41.725,24.746 U14.13@41.9,24.921
  Top Layer w0.4: U14.13@41.9,24.921 41.927,24.948 43.173,24.948 v1(43.2,24.975)
  Layer 1 w0.254: v1(43.2,24.975) 43.25,25.025 43.25,30.352 47.088,34.19 53.499,34.19 55.23,32.459 55.659,32.459 56.484,31.634 56.484,31.416 56.975,30.925 58.801,30.925 58.95,31.074 58.95,37.65 JP.4@62.875,41.575
  other v1: 65.062,29.092
GUARD: J6.4 U12.2 U12.7 | length 61.8
  Top Layer w0.4: J6.4@7.6,24.975 7.625,24.95 v3(11.5,24.95) ; v3(7.75,37.125) 7.712,37.163 7.645,37.163 7.192,37.616 7.138,37.616 7.1,37.654 6.986,37.654 6.537,38.103 v3(6.483,38.103) 6.469,38.089 5.539,38.089 v3(5.525,38.075) 5.487,38.037 5.291,38.037 4.779,37.525 v3(4.725,37.525) 4.725,37.471 4.235,36.981 4.235,36.744 v1(4.197,36.706) 4.224,36.679 4.224,35.803 v1(4.25,35.777) 4.288,35.738 4.288,35.641 4.825,35.104 v3(4.825,35.05) 4.879,35.05 5.289,34.64 5.562,34.64 v3(5.6,34.602) v3(6.6,34.602) 6.639,34.602 7.237,35.2 v3(7.275,35.2) 7.313,35.238 7.468,35.238 7.846,35.616 v3(7.9,35.616) 7.909,35.608 9.042,35.608 v3@9.088,35.562 ; v3@7.772,37.103 9.274,37.103 9.346,37.175 v3(9.4,37.175) ; v3@9.937,35.363 v3(9.975,35.325) 10.029,35.325 10.366,34.988 10.812,34.988 v3(10.85,34.95) 10.85,34.896 11.187,34.559 11.187,34.188 v3(11.225,34.15) 11.263,34.112 11.263,33.616 11.475,33.404 v3(11.475,33.35) v3(11.475,32.4) v3(11.475,28.275) ; v3(10.3,37.35) 10.338,37.388 10.809,37.388 11.096,37.675 v3(11.15,37.675) 11.15,37.729 11.512,38.091 11.512,38.387 v3(11.55,38.425) 11.55,38.479 11.89,38.819 11.89,39.387 v3(11.928,39.425) ; v3(11.5,18.35) v3(11.5,17.525) v3(11.5,16.7) 11.538,16.662 11.538,16.412 v3@12.8,15.15 ; v3(11.5,20.825) v3(11.5,24.125) ; v3(11.928,41.32) v3(11.928,42.945) ; v3(12.8,15.125) 13.437,14.488 13.437,14.413 v3(13.475,14.375) ; v3(13.553,41.32) v3(13.553,42.97) ; v3(13.9,39.55) 13.925,39.525 13.925,36.725 v3(13.95,36.7) ; v3(13.95,34.275) 13.938,34.262 13.938,32.05 v3@13.95,32.037 ; v3(14.025,27.875) 14.038,27.862 14.038,25.037 v3(14.05,25.025) v3(14.05,21.5) 14.05,17.679 13.925,17.554 13.925,16.95 v3(14.439,16.436) ; U12.2@17.74,9.563 U12.7@17.74,14.987
  other v3: 12.1,15.85 13.925,17.5 14,18.65 11.5,21.65 11.5,22.475 14.025,23.275 11.5,23.3 11.506,25.781 11.475,27.45 11.475,29.1 11.475,29.925 11.475,30.75 11.475,31.575 13.925,32.05 13.925,32.775 13.925,33.525 9.05,35.6 7.138,37.615 13.95,37.625 13.95,38.475
INT_HLD: J1.4 U13.11 U13.14 | length 52.5
  Top Layer w0.3: 41.465,48.5 41.465,50.04 43.446,52.021 51.006,52.021 53.433,49.594 58.882,49.594 66.327,42.149 66.327,33.764 67.716,32.375 J1.4@68.291,32.375
  Top Layer w0.4: U13.14@36.143,47.99 36.868,47.99 36.993,48.115 36.993,48.266 37.228,48.5 41.465,48.5 44.759,48.5 44.993,48.266 44.993,48.115 45.118,47.99 U13.11@45.843,47.99
INT_RST: J1.3 U13.10 U13.15 | length 59.7
  Top Layer w0.3: v1(36.525,50.325) 38.648,52.448 51.183,52.448 53.61,50.021 59.059,50.021 66.754,42.326 66.754,34.271 67.525,33.5 68.166,33.5 J1.3@68.291,33.375
  Top Layer w0.4: U13.15@36.143,46.72 36.268,46.595 38.73,46.595 ; v1(38.725,47.5) 38.725,46.6 38.73,46.595 ; U13.10@45.843,46.72 45.718,46.595 38.73,46.595
  Bottom Layer w0.4: v1(36.525,50.325) 36.563,50.287 36.563,49.662 v1(38.725,47.5)
INT_SLCTA: J1.1 U13.16 | length 58.5
  Top Layer w0.3: U13.16@36.143,45.45 34.675,45.45 30.75,49.375 30.75,51.712 31.913,52.875 51.36,52.875 53.787,50.448 59.252,50.448 67.181,42.519 67.181,35.91 67.716,35.375 J1.1@68.291,35.375
INT_SLCTB: J1.5 U13.9 | length 35.4
  Top Layer w0.3: U13.9@45.843,45.45 49.625,45.45 52.05,47.875 59.998,47.875 65.9,41.973 65.9,33.191 67.716,31.375 J1.5@68.291,31.375
IVC_SW_1: J1.19 U14.11 | length 37
  Top Layer w0.254: U14.11@41.9,22.381 42.006,22.487 42.139,22.353 43.397,22.353 v1(43.425,22.325) 50.791,22.325 50.998,22.118 51.478,21.637 51.791,21.325 54.809,21.325 55.247,20.887 55.247,16.838 57.149,14.936 v1(57.149,12.725)
  Layer 1 w0.254: v1(60.784,16.509) 61.675,17.4 67.9,17.4 v1(67.925,17.375)
  Bottom Layer w0.254: v1(57.149,12.725) 57.083,12.791 57.083,13.392 57.566,13.875 59.4,13.875 60.89,15.365 60.89,15.802 60.85,15.841 60.85,16.443 v1(60.784,16.509)
IVC_SW_1_Sol: J1.17 J2.18 J3.17 | length 8.8
  Top Layer w0.254: J2.18@61.647,20.215 62.192,20.215 62.434,19.974 62.434,19.8 62.815,19.419 62.815,18.91 64.025,17.7 65.95,17.7 67.477,19.227 68.143,19.227 J1.17@68.291,19.375
  other v1: 61.647,20.215
IVC_SW_2: J1.20 U14.12 | length 68.1
  Top Layer w0.254: 53.409,2.3 53.616,2.092 53.637,2.092 53.885,1.844 56.03,1.844 56.278,2.092 56.311,2.092
  Top Layer w0.3: v1(37.072,5.696) 37.1,5.669 37.1,4.164 37.943,3.321 39.029,3.321 40.05,2.3 53.409,2.3 ; v1(38.475,17.3) 40.025,18.85 40.025,22.867 40.634,23.476 41.725,23.476 U14.12@41.9,23.651 ; 56.311,2.092 56.402,2.183 56.402,3.552 56.768,3.918 61.05,3.918 65.286,8.154 68.754,8.154 69.081,8.481 69.087,8.481 69.704,9.098 69.704,9.104 70.224,9.624 70.224,10.269 70.221,10.272 70.221,10.521 70.224,10.524 70.224,12.56 69.188,13.596 69.188,15.478 68.841,15.826 68.841,16.25 68.716,16.375 J1.20@68.291,16.375
  Bottom Layer w0.3: v1(37.072,5.696) 37.072,13.222 38.325,14.475 38.325,17.069 38.475,17.219 v1(38.475,17.3)
IVC_SW_2_Sol: J1.18 J2.20 J3.19 | length 8.2
  Top Layer w0.254: v1(61.824,18.945) 61.756,18.877 61.756,18.069 62.55,17.275 66.5,17.275 67.452,18.227 68.143,18.227 J1.18@68.291,18.375
NetC00_2: C00.2 R0.1 TP7.1 U11.1 | length 11.5
  Top Layer w0.4: R0.1@4,18.721 4,17.9 4.125,17.775 4.125,17.725 4.425,17.425 C00.2@4.475,17.425 ; C00.2@4.525,17.425 4.825,17.125 4.825,16.9 TP7.1@6.2,15.525 ; U11.1@10.502,14.475 10.502,13.962 11.051,13.413 11.187,13.413 v1(11.225,13.375)
  Bottom Layer w0.4: TP7.1@6.2,15.525 8.35,13.375 v1(11.225,13.375)
NetC3_2: C3.2 R15.2 U3.8 | length 5.1
  Bottom Layer w0.3: 52.692,6.772 52.916,6.548 R15.2@52.916,4.313
  Bottom Layer w0.5: C3.2@50.697,3.75 50.697,3.922 50.997,4.222 52.632,4.222 52.689,4.279 R15.2@52.882,4.279
NetC9_2: C9.2 U5.5 | length 2
  Bottom Layer w0.35: C9.2@50.883,24.2 50.94,24.143 52.734,24.143 U5.5@52.791,24.086
NetC13_2: C13.2 R21.1 R22.2 U6.3 | length 5.6
  Bottom Layer w0.4: U6.3@45.256,29.989 46.614,29.989 C13.2@46.775,30.15 ; C13.2@46.775,30.1 47.475,29.4 R21.1@48.7,29.4 48.725,29.425 50.475,29.425 R22.2@50.5,29.45
NetC15_1: C15.1 L1.2 U7.1 | length 5.6
  Bottom Layer w0.4: L1.2@47.784,47.133 L1.2@47.825,47.174
  Bottom Layer w0.6: L1.2@47.825,47.174 C15.1@47.825,49.475 ; L1.2@47.876,47.1 U7.1@51.107,47.1
NetC15_2: C15.2 D1.2 L2.1 | length 5.6
  Bottom Layer w0.6: C15.2@49.525,49.475 L2.1@51.775,49.475 ; L2.1@52.372,49.624 52.672,49.925 D1.2@55.645,49.925
NetC16_2: C16.2 R23.1 R24.2 U7.3 | length 8.1
  Bottom Layer w0.6: U7.3@52.941,47.01 52.941,46.985 54.635,46.985 56.5,48.85 57.875,48.85 C16.2@58.05,49.025 R23.1@60.125,49.025 ; R24.2@54.75,46.661 R24.2@54.75,46.682
NetC17_1: C17.1 R24.1 R25.2 | length 4
  Bottom Layer w0.5: R24.1@54.757,45.704 56.575,45.704 56.9,45.379 R25.2@56.9,45.275 ; R25.2@56.706,45.704 56.706,47.262 56.719,47.275 C17.1@56.771,47.275
NetC21_1: C21.1 R26.1 U8.8 | length 5
  Bottom Layer w0.3: C21.1@39.903,49.242 39.903,51.006 40.05,51.153 U8.8@40.944,51.153 ; C21.1@40.415,48.892 R26.1@42.569,48.892
NetC30_2: C30.2 J_TIA.1 K2.3 R39.2 U2.2 U12.6 | length 68.7
  Top Layer w0.3: U12.6@19.01,14.987 19.01,12.549 21.584,9.975 23.8,9.975 27.924,5.851 J_TIA.1@27.925,5.25 J_TIA.1@27.925,5.25 ; v1@41.475,9.15 40.725,8.4 40.725,3.95 41.094,3.581 51.277,3.581 51.779,4.083 U2.2@51.779,4.979
  Top Layer w0.6: R39.2@15.575,21.525 R39.2@15.641,21.525 ; U12.6@19.01,14.987 19.01,16.715 17.399,18.326 15.882,18.326 15.632,18.576 15.632,19.745 15.641,19.754 R39.2@15.641,21.525 ; K2.3@22.969,19.682 21.126,21.525 R39.2@15.641,21.525
  Layer 2 w0.3: J_TIA.1@27.925,5.25 26.858,6.317 26.858,8.792 27.716,9.65 41.025,9.65 41.475,9.2 v1(41.475,9.129)
NetC31_2: C31.2 K1.3 R40.2 | length 10.8
  Top Layer w0.6: R40.2@15.632,30.295 15.657,30.27 15.657,27.621 15.632,27.596 21.151,27.596 K1.3@22.969,25.778
NetC32_2: C32.2 R43.1 R44.2 RT1.2 | length 28.4
  Bottom Layer w0.254: RT1.2@17.4,10.7 17.413,10.687 19.142,10.687 C32.2@19.154,10.675 19.504,11.025 20.025,11.025 23.774,7.276 32.054,7.276 33.754,5.575 33.754,5.386 35.815,3.325 36.514,3.325 36.518,3.321 37.582,3.321 37.586,3.325 R43.1@39.675,3.325 39.947,3.053 40.407,3.053 41.114,2.346 R44.2@41.9,2.346
NetC53_2: C53.2 TP9.1 U2.23 | length 6.4
  Top Layer w0.254: TP9.1@47.625,14.1 49.35,14.1 49.85,13.6 49.85,12.699 49.999,12.55 50.795,12.55 50.805,12.54 51.285,12.54 51.77,12.055 51.77,11.188 U2.23@51.779,11.179
NetD2_2: D2.2 R18.1 | length 1.8
  Top Layer w0.35: D2.2@12.15,49.096 R18.1@12.15,50.875
NetJ5_1: J5.1 R27.1 U10.1 | length 12.6
  Top Layer w0.3: J5.1@3.375,11.36 3.998,10.737 4.488,10.737 9.1,6.125 9.84,6.125 10.461,5.503 U10.1@11.67,5.503 12.642,5.503 13.225,4.921 R27.1@13.225,4.871
NetJ6_3: J6.3 R41.1 R42.2 | length 52.1
  Bottom Layer w0.254: J6.3@5,25.775 5.071,25.775 5.563,25.283 5.563,25.229 7.586,23.206 7.998,23.206 8.631,22.573 8.631,21.677 8.55,21.596 8.55,14.975 9.275,14.25 11.55,14.25 12.813,12.987 16.651,12.987 16.868,13.204 19.661,13.204 24.79,8.075 32.332,8.075 34.516,5.891 34.516,5.701 35.29,4.928 36.318,4.928 36.319,4.929 38.246,4.929 39.025,4.15 R41.1@41.429,4.15 41.504,4.225 R42.2@43.25,4.225
NetJ7_1: J7.1 R43.2 | length 68.2